# Allegro board TEST.brd
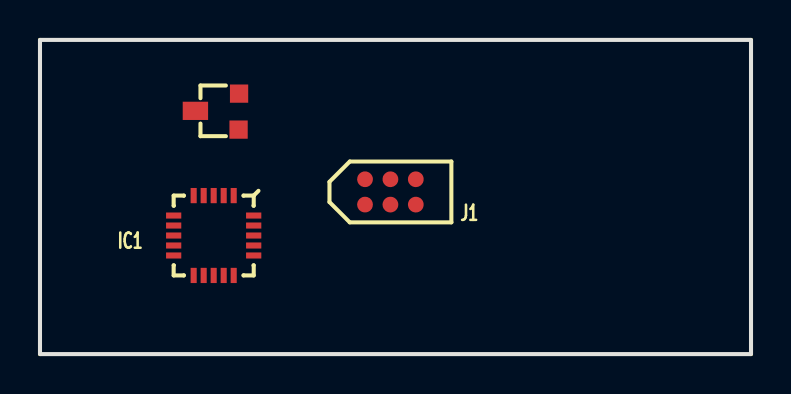
[diagram p0: board, top side]
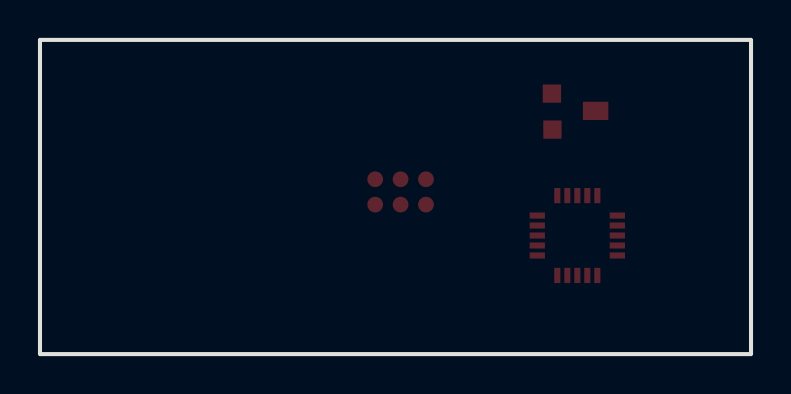
[diagram p1: board, bottom side, seen from below]

Outline 35.56 x 15.75 mm; copper layers: TOP, GND, INNER, BOTTOM. Coordinates in mm from the lower left corner of the outline.
Outline path: 0,15.75 35.56,15.75 35.56,0 0,0 0,15.75

## Placement (name value [footprint] x y rotation side)
IC1  PIC18F13K22-ML  [X_20QFN_4X4]  8.69 5.94 0 top
J1  -  [TC2030-MCP-NL]  17.53 8.13 0 top
TR2  2N3904_SOT23  [X_SOT23]  9.93 10.92 0 top

## Library data of the parts
IC1 = PIC18F13K22-ML
J1 = TC2030-MCP-NL
TR2 = NPN_0

## Footprints (pads in the part's own frame, mm; a bottom-side part is the same pattern mirrored in y, then rotated)
TC2030-MCP-NL
  round 0 hole 0.95: (-2.54,0) (2.54,1.016) (2.54,-1.016)
  round 0.787 smd: 1(-1.27,-0.635) 2(-1.27,0.635) 3(0,-0.635) 4(0,0.635) 5(1.27,-0.635) 6(1.27,0.635)
X_20QFN_4X4
  rect 0.305x0.762 smd: 1(1.001,2.002) 2(0.5,2.002) 3(0,2.002) 4(-0.5,2.002) 5(-1.001,2.002) 11(-1.001,-2.002) 12(-0.5,-2.002) 13(0,-2.002) 14(0.5,-2.002) 15(1.001,-2.002)
  rect 0.762x0.305 smd: 6(-2.002,1.001) 7(-2.002,0.5) 8(-2.002,0) 9(-2.002,-0.5) 10(-2.002,-1.001) 16(2.002,-1.001) 17(2.002,-0.5) 18(2.002,0) 19(2.002,0.5) 20(2.002,1.001)
X_SOT23
  rect 0.914x0.914 smd: 1(0,0.33) 2(0.025,2.134)
  rect 1.27x0.914 smd: 3(-2.159,1.27)

## Nets
+5V: IC1.18(VDD) J1.2(VDD)
GND_SIGNAL: IC1.17(VSS) J1.3(GND) TR2.2(E)
VBATT: IC1.13(RC0/AN4)
DAT_FM_LMP1: IC1.9(RB5/RX)
DAT_FM_LMP2: IC1.8(RB6/SCL)
DAT_TO_LMP1: IC1.7(RB7/TX)
DAT_TO_LMP2: IC1.10(RB4/SDA)
LMP1_ON: IC1.11(RC2)
LMP2_ON: IC1.6(RC7)
MCLR: IC1.1(MCLR) J1.1(MCLR/VPP)
THERM: IC1.5(RC6/AN8)
THERM_ENA: IC1.3(RC4)
N00295: TR2.3(C)
N06234: IC1.19(RA5/OSC1)
N06377: IC1.20(RA4/OSC2)
N28822: TR2.1(B)
N40114: IC1.15(A1PGC) J1.5(PGC)
N40717: IC1.16(A0PGD) J1.4(PGD)

Pads without a net: IC1 2 4 12 14; J1 6
